# Altium PCB Driver_PCB.PcbDoc
Units mm, origin at the board's own origin, x right, y up, seen from the top; angles counter-clockwise.
Board outline 42 x 70 mm, 2 copper layers (Top Layer, Bottom Layer); 140 components, 0 nets, 464 pads, 56 vias.
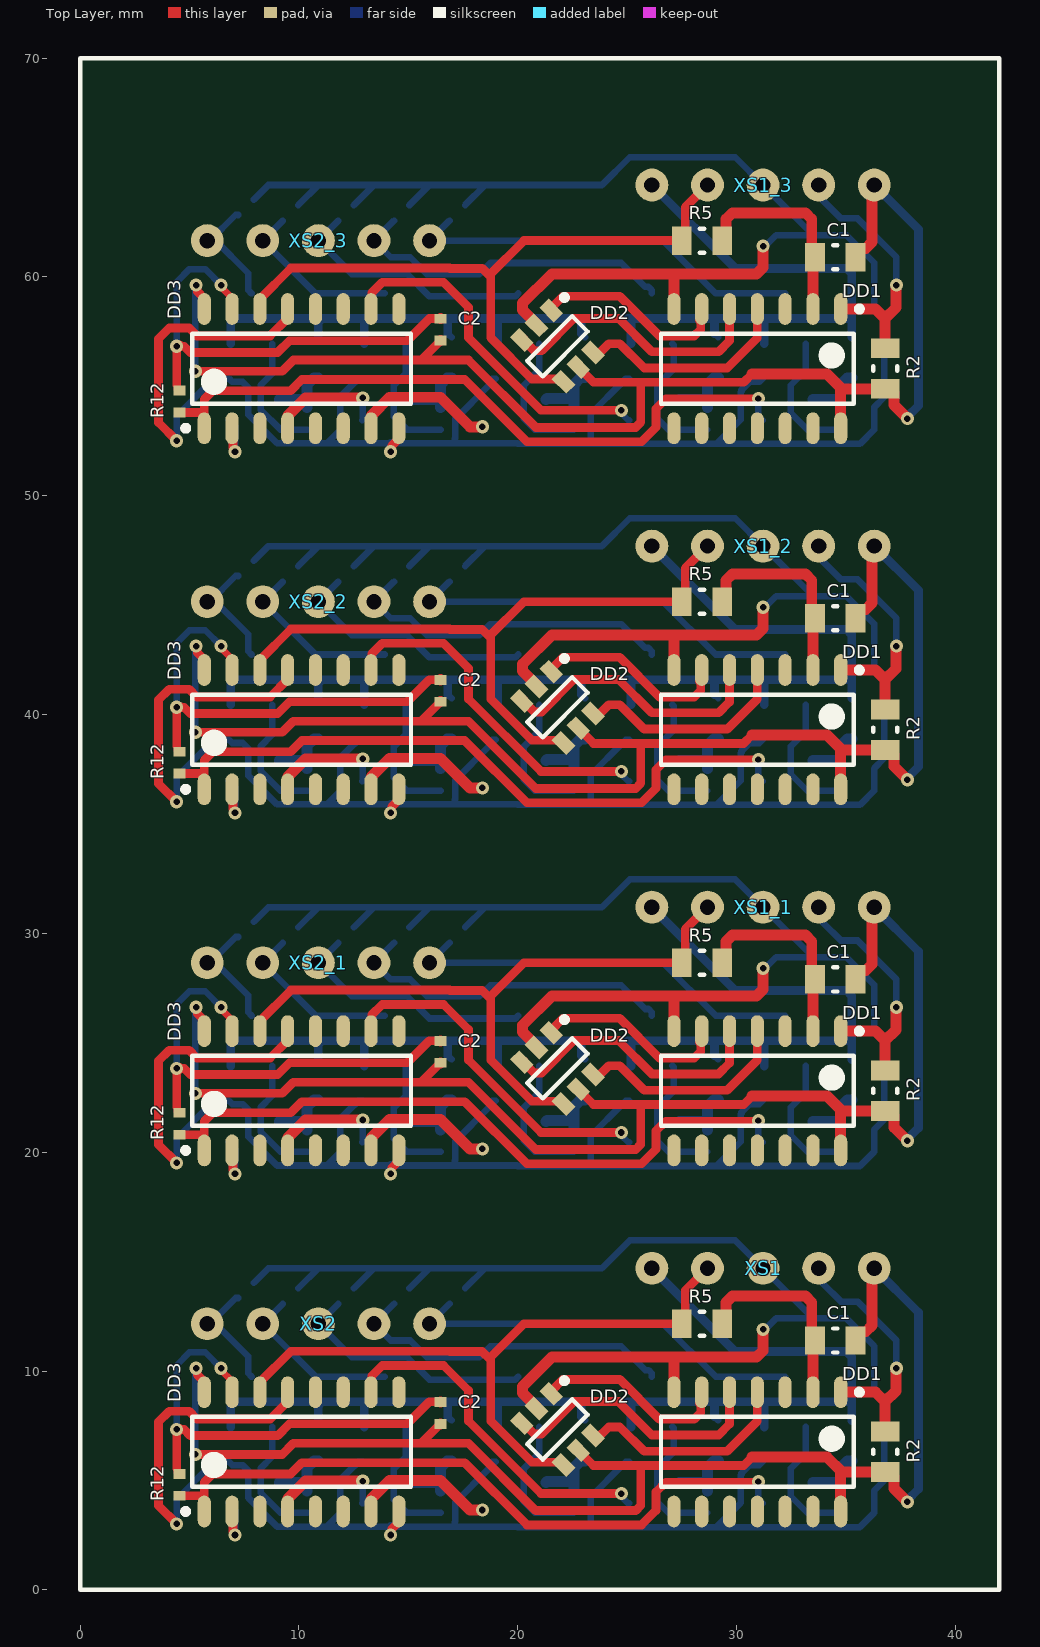
[diagram p0: Top Layer view]
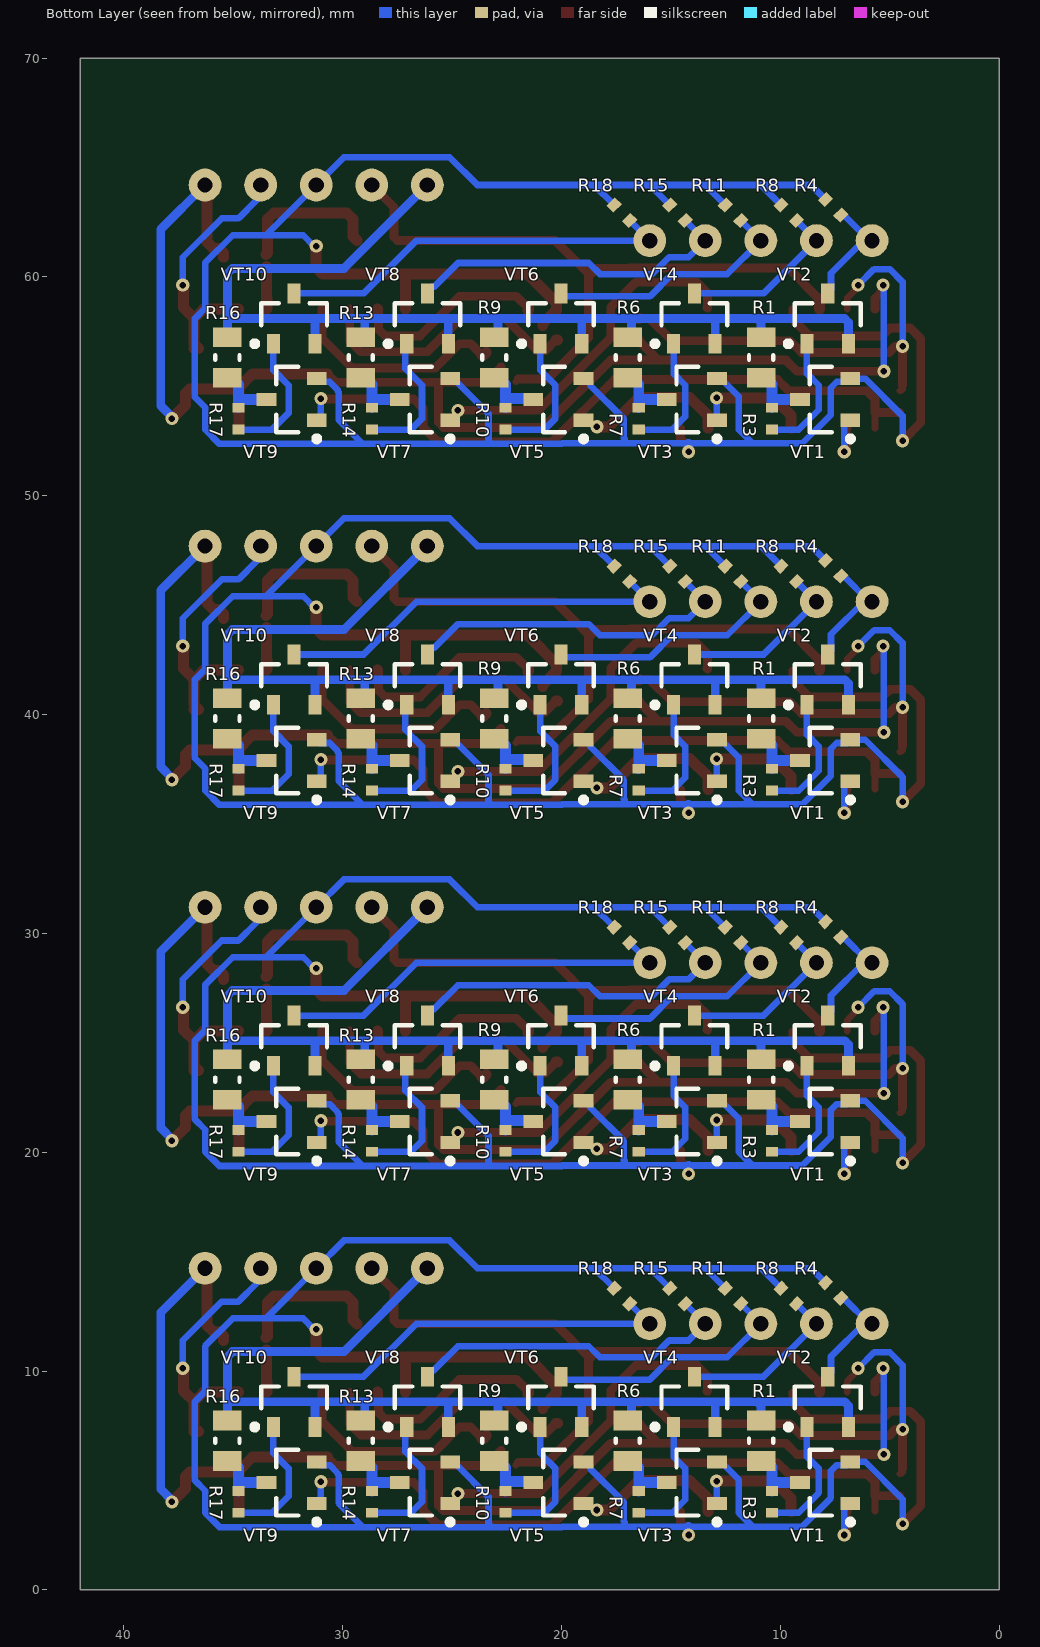
[diagram p1: Bottom Layer view, seen from below]

## Layer stack, top to bottom
Top Solder: solder mask 0.0102, Solder Resist, Dk 3.5
Top Layer: signal copper 0.0356
Dielectric 1: dielectric 0.32, FR-4, Dk 4.8
Bottom Layer: signal copper 0.0356
Bottom Solder: solder mask 0.0102, Solder Resist, Dk 3.5

## Board outline
0,0 0,70 42,70 42,0

## Design rules (kind name [scope] priority, off if disabled: settings)
Clearance [All] p1: gap=0.254 ignorepadtopadclearanceinfootprint=FALSE except(0: Arc-Hole Track-Hole SMDPad-Hole THPad-Hole Via-Hole Fill-Hole Poly-Hole Region-Hole Text-Hole)
PolygonConnect [All] p1: connectstyle=Relief reliefconductorwidth=0.254 reliefentries=4 polygonreliefangle="90 Angle" airgapwidth=0.254
RoutingVias [All] p1: holewidth=0.711 width=1.27 viastyle="Through Hole" minholewidth=0.711 minwidth=1.27 maxholewidth=0.711 maxwidth=1.27
SolderMaskExpansion [All] p1: expansion=0.102 istentingtop=FALSE
Width [All] p1: maxlimit=1 minlimit=0.254 preferedwidth=0.254 minimp=50.000000 maximp=50.000000 favimp=50.000000
30 further rules are at their usual default settings.

## Components (designator, comment, footprint, x,y, rotation, side; value= is the part's Value field where it differs from the comment)
C1 "C0805" CHIP-0805 34.512,60.898 r180 top
C1 "C0805" CHIP-0805 34.512,44.398 r180 top
C1 "C0805" CHIP-0805 34.512,27.898 r180 top
C1 "C0805" CHIP-0805 34.512,11.398 r180 top
C2 "C0805" CHIP-0402 16.47,57.588 r90 top
C2 "C0805" CHIP-0402 16.47,41.088 r90 top
C2 "C0805" CHIP-0402 16.47,24.588 r90 top
C2 "C0805" CHIP-0402 16.47,8.088 r90 top
DD1 "CD4024" SOIC-14 30.948,55.81 r270 top
DD1 "CD4024" SOIC-14 30.948,39.31 r270 top
DD1 "CD4024" SOIC-14 30.948,22.81 r270 top
DD1 "CD4024" SOIC-14 30.948,6.31 r270 top
DD2 "74LVC1G11" SOT23-6 21.812,56.834 r315 top
DD2 "74LVC1G11" SOT23-6 21.812,40.334 r315 top
DD2 "74LVC1G11" SOT23-6 21.812,23.834 r315 top
DD2 "74LVC1G11" SOT23-6 21.812,7.334 r315 top
DD3 "CD4017" SOIC-16 10.12,55.81 r90 top
DD3 "CD4017" SOIC-16 10.12,39.31 r90 top
DD3 "CD4017" SOIC-16 10.12,22.81 r90 top
DD3 "CD4017" SOIC-16 10.12,6.31 r90 top
R1 "R0805" CHIP-0805 10.882,56.318 r90 bottom
R1 "R0805" CHIP-0805 10.882,39.818 r90 bottom
R1 "R0805" CHIP-0805 10.882,23.318 r90 bottom
R1 "R0805" CHIP-0805 10.882,6.818 r90 bottom
R2 "R0805" CHIP-0805 36.79,55.81 r270 top
R2 "R0805" CHIP-0805 36.79,39.31 r270 top
R2 "R0805" CHIP-0805 36.79,22.81 r270 top
R2 "R0805" CHIP-0805 36.79,6.31 r270 top
R3 "R0805" CHIP-0402 10.374,53.524 r270 bottom
R3 "R0805" CHIP-0402 10.374,37.024 r270 bottom
R3 "R0805" CHIP-0402 10.374,20.524 r270 bottom
R3 "R0805" CHIP-0402 10.374,4.024 r270 bottom
R4 "R0805" CHIP-0402 7.588,63.184 r225 bottom
R4 "R0805" CHIP-0402 7.588,46.684 r225 bottom
R4 "R0805" CHIP-0402 7.588,30.184 r225 bottom
R4 "R0805" CHIP-0402 7.588,13.684 r225 bottom
R5 "R0805" CHIP-0805 28.416,61.66 r180 top
R5 "R0805" CHIP-0805 28.416,45.16 r180 top
R5 "R0805" CHIP-0805 28.416,28.66 r180 top
R5 "R0805" CHIP-0805 28.416,12.16 r180 top
R6 "R0805" CHIP-0805 16.978,56.318 r90 bottom
R6 "R0805" CHIP-0805 16.978,39.818 r90 bottom
R6 "R0805" CHIP-0805 16.978,23.318 r90 bottom
R6 "R0805" CHIP-0805 16.978,6.818 r90 bottom
R7 "R0805" CHIP-0402 16.47,53.524 r270 bottom
R7 "R0805" CHIP-0402 16.47,37.024 r270 bottom
R7 "R0805" CHIP-0402 16.47,20.524 r270 bottom
R7 "R0805" CHIP-0402 16.47,4.024 r270 bottom
R8 "R0805" CHIP-0402 9.62,62.93 r225 bottom
R8 "R0805" CHIP-0402 9.62,46.43 r225 bottom
R8 "R0805" CHIP-0402 9.62,29.93 r225 bottom
R8 "R0805" CHIP-0402 9.62,13.43 r225 bottom
R9 "R0805" CHIP-0805 23.074,56.318 r90 bottom
R9 "R0805" CHIP-0805 23.074,39.818 r90 bottom
R9 "R0805" CHIP-0805 23.074,23.318 r90 bottom
R9 "R0805" CHIP-0805 23.074,6.818 r90 bottom
R10 "R0805" CHIP-0402 22.566,53.524 r270 bottom
R10 "R0805" CHIP-0402 22.566,37.024 r270 bottom
R10 "R0805" CHIP-0402 22.566,20.524 r270 bottom
R10 "R0805" CHIP-0402 22.566,4.024 r270 bottom
R11 "R0805" CHIP-0402 12.16,62.93 r225 bottom
R11 "R0805" CHIP-0402 12.16,46.43 r225 bottom
R11 "R0805" CHIP-0402 12.16,29.93 r225 bottom
R11 "R0805" CHIP-0402 12.16,13.43 r225 bottom
R12 "R0805" CHIP-0402 4.54,54.302 r270 top
R12 "R0805" CHIP-0402 4.54,37.802 r270 top
R12 "R0805" CHIP-0402 4.54,21.302 r270 top
R12 "R0805" CHIP-0402 4.54,4.802 r270 top
R13 "R0805" CHIP-0805 29.17,56.318 r90 bottom
R13 "R0805" CHIP-0805 29.17,39.818 r90 bottom
R13 "R0805" CHIP-0805 29.17,23.318 r90 bottom
R13 "R0805" CHIP-0805 29.17,6.818 r90 bottom
R14 "R0805" CHIP-0402 28.662,53.524 r270 bottom
R14 "R0805" CHIP-0402 28.662,37.024 r270 bottom
R14 "R0805" CHIP-0402 28.662,20.524 r270 bottom
R14 "R0805" CHIP-0402 28.662,4.024 r270 bottom
R15 "R0805" CHIP-0402 14.7,62.93 r225 bottom
R15 "R0805" CHIP-0402 14.7,46.43 r225 bottom
R15 "R0805" CHIP-0402 14.7,29.93 r225 bottom
R15 "R0805" CHIP-0402 14.7,13.43 r225 bottom
R16 "R0805" CHIP-0805 35.266,56.318 r90 bottom
R16 "R0805" CHIP-0805 35.266,39.818 r90 bottom
R16 "R0805" CHIP-0805 35.266,23.318 r90 bottom
R16 "R0805" CHIP-0805 35.266,6.818 r90 bottom
R17 "R0805" CHIP-0402 34.758,53.524 r270 bottom
R17 "R0805" CHIP-0402 34.758,37.024 r270 bottom
R17 "R0805" CHIP-0402 34.758,20.524 r270 bottom
R17 "R0805" CHIP-0402 34.758,4.024 r270 bottom
R18 "R0805" CHIP-0402 17.24,62.93 r225 bottom
R18 "R0805" CHIP-0402 17.24,46.43 r225 bottom
R18 "R0805" CHIP-0402 17.24,29.93 r225 bottom
R18 "R0805" CHIP-0402 17.24,13.43 r225 bottom
VT1 "2N7000" SOT23-3 7.95,54.402 r0 bottom
VT1 "2N7000" SOT23-3 7.95,37.902 r0 bottom
VT1 "2N7000" SOT23-3 7.95,21.402 r0 bottom
VT1 "2N7000" SOT23-3 7.95,4.902 r0 bottom
VT2 "BC808" SOT23-3 7.834,58.096 r90 bottom
VT2 "BC808" SOT23-3 7.834,41.596 r90 bottom
VT2 "BC808" SOT23-3 7.834,25.096 r90 bottom
VT2 "BC808" SOT23-3 7.834,8.596 r90 bottom
VT3 "2N7000" SOT23-3 14.046,54.402 r0 bottom
VT3 "2N7000" SOT23-3 14.046,37.902 r0 bottom
VT3 "2N7000" SOT23-3 14.046,21.402 r0 bottom
VT3 "2N7000" SOT23-3 14.046,4.902 r0 bottom
VT4 "BC808" SOT23-3 13.93,58.096 r90 bottom
VT4 "BC808" SOT23-3 13.93,41.596 r90 bottom
VT4 "BC808" SOT23-3 13.93,25.096 r90 bottom
VT4 "BC808" SOT23-3 13.93,8.596 r90 bottom
VT5 "2N7000" SOT23-3 20.142,54.402 r0 bottom
VT5 "2N7000" SOT23-3 20.142,37.902 r0 bottom
VT5 "2N7000" SOT23-3 20.142,21.402 r0 bottom
VT5 "2N7000" SOT23-3 20.142,4.902 r0 bottom
VT6 "BC808" SOT23-3 20.026,58.096 r90 bottom
VT6 "BC808" SOT23-3 20.026,41.596 r90 bottom
VT6 "BC808" SOT23-3 20.026,25.096 r90 bottom
VT6 "BC808" SOT23-3 20.026,8.596 r90 bottom
VT7 "2N7000" SOT23-3 26.238,54.402 r0 bottom
VT7 "2N7000" SOT23-3 26.238,37.902 r0 bottom
VT7 "2N7000" SOT23-3 26.238,21.402 r0 bottom
VT7 "2N7000" SOT23-3 26.238,4.902 r0 bottom
VT8 "BC808" SOT23-3 26.122,58.096 r90 bottom
VT8 "BC808" SOT23-3 26.122,41.596 r90 bottom
VT8 "BC808" SOT23-3 26.122,25.096 r90 bottom
VT8 "BC808" SOT23-3 26.122,8.596 r90 bottom
VT9 "2N7000" SOT23-3 32.334,54.402 r0 bottom
VT9 "2N7000" SOT23-3 32.334,37.902 r0 bottom
VT9 "2N7000" SOT23-3 32.334,21.402 r0 bottom
VT9 "2N7000" SOT23-3 32.334,4.902 r0 bottom
VT10 "BC808" SOT23-3 32.218,58.096 r90 bottom
VT10 "BC808" SOT23-3 32.218,41.596 r90 bottom
VT10 "BC808" SOT23-3 32.218,25.096 r90 bottom
VT10 "BC808" SOT23-3 32.218,8.596 r90 bottom
XS1 "Socket" SOCKET 26.13,14.7 r0 top
XS1_1 "Socket" SOCKET 26.13,31.2 r0 top (schematic designator XS1)
XS1_2 "Socket" SOCKET 26.13,47.7 r0 top (schematic designator XS1)
XS1_3 "Socket" SOCKET 26.13,64.2 r0 top (schematic designator XS1)
XS2 "Socket" SOCKET 5.81,12.16 r0 top
XS2_1 "Socket" SOCKET 5.81,28.66 r0 top (schematic designator XS2)
XS2_2 "Socket" SOCKET 5.81,45.16 r0 top (schematic designator XS2)
XS2_3 "Socket" SOCKET 5.81,61.66 r0 top (schematic designator XS2)

## Footprints (in the part's own frame and the unit in brackets; to place one, negate y for a bottom-side part, rotate by r counter-clockwise, add the part's x,y. Pads: shape width x height; smd on the part's side, far side on the other; paste and mask are expansions set on the pad)
CHIP-0402 [mm] "Chip Resistor, 2-Leads, Body 1,00x0,50mm, IPC Medium Density"
  rect 0.45x0.55 smd: 1(-0.5,0) 2(0.5,0)
  body extent -0.5,-0.25 0.5,0.25, height 0.35
CHIP-0805 [mm] "Chip Resistor, 2-Leads, Body 2,00x1,25mm, IPC Medium Density"
  rect 0.9x1.3 smd: 1(-0.925,0) 2(0.925,0)
  silkscreen extent -0.1,-0.55 0.1,0.55, body extent -1,-0.63 1,0.63, height 0.7
SOCKET [mm]
  round 1.5 hole 0.7: 1(0,0) 2(2.54,0) 3(5.08,0) 4(7.62,0) 5(10.16,0)
SOIC-14 [mm] "SOIC, 14-Leads, Body 8,65x3,90mm, Pitch 1,27mm, IPC Medium Density"
  oval 1.45x0.6 smd: 1(-2.725,3.81) 2(-2.725,2.54) 3(-2.725,1.27) 4(-2.725,0) 5(-2.725,-1.27) 6(-2.725,-2.54) 7(-2.725,-3.81) 8(2.725,-3.81) 9(2.725,-2.54) 10(2.725,-1.27) 11(2.725,0) 12(2.725,1.27) 13(2.725,2.54) 14(2.725,3.81)
  silkscreen extent -2.85,-4.4 1.6,4.79, body extent -2,-4.4 2,4.4, height 1.75
SOIC-16 [mm] "SOIC, 16-Leads, Body 9,90x3,90mm, Pitch 1,27mm, IPC Medium Density"
  oval 1.45x0.6 smd: 1(-2.725,4.445) 2(-2.725,3.175) 3(-2.725,1.905) 4(-2.725,0.635) 5(-2.725,-0.635) 6(-2.725,-1.905) 7(-2.725,-3.175) 8(-2.725,-4.445) 9(2.725,-4.445) 10(2.725,-3.175) 11(2.725,-1.905) 12(2.725,-0.635) 13(2.725,0.635) 14(2.725,1.905) 15(2.725,3.175) 16(2.725,4.445)
  silkscreen extent -2.85,-5 1.6,5.42, body extent -2,-5 2,5, height 1.75
SOT23-3 [mm] "SOT23, 3-Leads, Body 2,90x2,30mm, Pitch 0,95mm, IPC Medium Density"
  rect 0.9x0.6 smd: 1(-1.15,0.95) 2(-1.15,-0.95) 3(1.15,0)
  silkscreen extent -1.27,-1.5 0.7,1.92, body extent -0.7,-1.5 0.7,1.5, height 1.1
SOT23-6 [mm] "SOT23, 6-Leads, Body 2,85x2,80mm, Pitch 0,95mm, IPC Medium Density"
  rect 0.95x0.6 smd: 1(-1.35,0.95) 2(-1.35,0) 3(-1.35,-0.95) 4(1.35,-0.95) 5(1.35,0) 6(1.35,0.95)
  silkscreen extent -1.47,-1.45 0.5,1.92, body extent -0.88,-1.45 0.88,1.45, height 1.1

## Via types
v1: diameter 0.6, hole 0.3, Top Layer to Bottom Layer, 56 vias

## Nets (pads, with @x,y where several pads share a name; then routed paths per layer and width w, separated by ;. In a path a pad name is that pad's centre, name@x,y a point inside that pad or via, vN(x,y) a via of type N, cw(c..) or ccw(c..) an arc to the next point about the centre after c; other vN are vias at no path point)
pads on no net: C1.1 C1.2 C2.1 C2.2 DD1.1 DD1.2 DD1.3 DD1.4 DD1.5 DD1.6 DD1.7 DD1.8 DD1.9 DD1.10 DD1.11 DD1.12 DD1.13 DD1.14 DD2.1 DD2.2 DD2.3 DD2.4 DD2.5 DD2.6 DD3.1 DD3.2 DD3.3 DD3.4 DD3.5 DD3.6 DD3.7 DD3.8 DD3.9 DD3.10 DD3.11 DD3.12 DD3.13 DD3.14 DD3.15 DD3.16 R1.1 R1.2 R2.1 R2.2 R3.1 R3.2 R4.1 R4.2 R5.1 R5.2 R6.1 R6.2 R7.1 R7.2 R8.1 R8.2 R9.1 R9.2 R10.1 R10.2 R11.1 R11.2 R12.1 R12.2 R13.1 R13.2 R14.1 R14.2 R15.1 R15.2 R16.1 R16.2 R17.1 R17.2 R18.1 R18.2 VT1.1 VT1.2 VT1.3 VT2.1 VT2.2 VT2.3 VT3.1 VT3.2 VT3.3 VT4.1 VT4.2 VT4.3 VT5.1 VT5.2 VT5.3 VT6.1 VT6.2 VT6.3 VT7.1 VT7.2 VT7.3 VT8.1 VT8.2 VT8.3 VT9.1 VT9.2 VT9.3 VT10.1 VT10.2 VT10.3 XS1.1 XS1.2 XS1.3 XS1.4 XS1.5 XS1_1.1 XS1_1.2 XS1_1.3 XS1_1.4 XS1_1.5 XS1_2.1 XS1_2.2 XS1_2.3 XS1_2.4 XS1_2.5 XS1_3.1 XS1_3.2 XS1_3.3 XS1_3.4 XS1_3.5 XS2.1 XS2.2 XS2.3 XS2.4 XS2.5 XS2_1.1 XS2_1.2 XS2_1.3 XS2_1.4 XS2_1.5 XS2_2.1 XS2_2.2 XS2_2.3 XS2_2.4 XS2_2.5 XS2_3.1 XS2_3.2 XS2_3.3 XS2_3.4 XS2_3.5
copper on no net: | length 2063.4
  Top Layer w0.3: 4.413,5.553 4.415,5.551 4.415,5.377 4.49,5.302 4.54,5.302 ; 4.413,22.053 4.415,22.051 4.415,21.877 4.49,21.802 4.54,21.802 ; 4.413,38.553 4.415,38.551 4.415,38.377 4.49,38.302 4.54,38.302 ; 4.413,55.053 4.415,55.051 4.415,54.877 4.49,54.802 4.54,54.802 ; 5.675,3.585 5.675,4.302 ; 5.675,20.085 5.675,20.802 ; 5.675,36.585 5.675,37.302 ; 5.675,53.085 5.675,53.802 ; v1(6.445,10.128) 6.445,10.041 6.945,9.541 6.945,9.035 ; v1(6.445,26.628) 6.445,26.541 6.945,26.041 6.945,25.535 ; v1(6.445,43.128) 6.445,43.041 6.945,42.541 6.945,42.035 ; v1(6.445,59.628) 6.445,59.541 6.945,59.041 6.945,58.535 ; 9.485,8.61 9.485,9.035 ; 9.485,25.11 9.485,25.535 ; 9.485,41.61 9.485,42.035 ; 9.485,58.11 9.485,58.535 ; 13.295,9.035 13.352,9.092 ; 13.295,25.535 13.352,25.592 ; 13.295,42.035 13.352,42.092 ; 13.295,58.535 13.352,58.592 ; 21.971,5.831 22.095,5.708 ; 21.971,22.331 22.095,22.208 ; 21.971,38.831 22.095,38.708 ; 21.971,55.331 22.095,55.208
  Top Layer w0.4: v1(4.413,3.016) 3.584,3.845 3.584,7.677 4.07,8.163 4.985,8.163 5.342,7.806 8.681,7.806 9.485,8.61 ; 4.413,5.553 v1(4.413,7.334) ; v1(4.413,19.516) 3.584,20.345 3.584,24.177 4.07,24.663 4.985,24.663 5.342,24.306 8.681,24.306 9.485,25.11 ; 4.413,22.053 v1(4.413,23.834) ; v1(4.413,36.016) 3.584,36.845 3.584,40.677 4.07,41.163 4.985,41.163 5.342,40.806 8.681,40.806 9.485,41.61 ; 4.413,38.553 v1(4.413,40.334) ; v1(4.413,52.516) 3.584,53.345 3.584,57.177 4.07,57.663 4.985,57.663 5.342,57.306 8.681,57.306 9.485,58.11 ; 4.413,55.053 v1(4.413,56.834) ; 4.54,4.302 5.675,4.302 5.675,4.913 6.064,5.302 9.62,5.302 10.128,5.81 17.581,5.81 20.421,2.97 25.659,2.97 26.321,3.632 26.321,4.477 26.765,4.921 v1@30.956,4.921 ; v1@4.54,7.334 4.748,7.334 5.03,7.052 9.034,7.052 9.57,7.588 14.954,7.588 15.962,8.596 16.462,8.596 ; 4.54,20.802 5.675,20.802 5.675,21.413 6.064,21.802 9.62,21.802 10.128,22.31 17.581,22.31 20.421,19.47 25.659,19.47 26.321,20.132 26.321,20.977 26.765,21.421 v1@30.956,21.421 ; v1@4.54,23.834 4.748,23.834 5.03,23.552 9.034,23.552 9.57,24.088 14.954,24.088 15.962,25.096 16.462,25.096 ; 4.54,37.302 5.675,37.302 5.675,37.913 6.064,38.302 9.62,38.302 10.128,38.81 17.581,38.81 20.421,35.97 25.659,35.97 26.321,36.632 26.321,37.477 26.765,37.921 v1@30.956,37.921 ; v1@4.54,40.334 4.748,40.334 5.03,40.052 9.034,40.052 9.57,40.588 14.954,40.588 15.962,41.596 16.462,41.596 ; 4.54,53.802 5.675,53.802 5.675,54.413 6.064,54.802 9.62,54.802 10.128,55.31 17.581,55.31 20.421,52.47 25.659,52.47 26.321,53.132 26.321,53.977 26.765,54.421 v1@30.956,54.421 ; v1@4.54,56.834 4.748,56.834 5.03,56.552 9.034,56.552 9.57,57.088 14.954,57.088 15.962,58.096 16.462,58.096 ; v1(5.269,6.191) 9.239,6.191 9.747,6.699 15.581,6.699 ; v1(5.269,22.691) 9.239,22.691 9.747,23.199 15.581,23.199 ; v1(5.269,39.191) 9.239,39.191 9.747,39.699 15.581,39.699 ; v1(5.269,55.691) 9.239,55.691 9.747,56.199 15.581,56.199 ; v1(5.302,10.128) 5.35,10.08 5.35,9.839 5.675,9.514 5.675,9.035 ; v1(5.302,26.628) 5.35,26.58 5.35,26.339 5.675,26.014 5.675,25.535 ; v1(5.302,43.128) 5.35,43.08 5.35,42.839 5.675,42.514 5.675,42.035 ; v1(5.302,59.628) 5.35,59.58 5.35,59.339 5.675,59.014 5.675,58.535 ; 6.945,3.585 6.983,3.547 6.983,2.672 7.08,2.576 v1(7.08,2.508) ; 6.945,20.085 6.983,20.047 6.983,19.172 7.08,19.076 v1(7.08,19.008) ; 6.945,36.585 6.983,36.547 6.983,35.672 7.08,35.576 v1(7.08,35.508) ; 6.945,53.085 6.983,53.047 6.983,52.172 7.08,52.076 v1(7.08,52.008) ; 8.215,9.485 9.639,10.909 16.876,10.909 16.895,10.89 18.383,10.89 18.764,10.509 18.764,7.715 20.648,5.831 21.971,5.831 ; 8.215,25.985 9.639,27.409 16.876,27.409 16.895,27.39 18.383,27.39 18.764,27.009 18.764,24.215 20.648,22.331 21.971,22.331 ; 8.215,42.485 9.639,43.909 16.876,43.909 16.895,43.89 18.383,43.89 18.764,43.509 18.764,40.715 20.648,38.831 21.971,38.831 ; 8.215,58.985 9.639,60.409 16.876,60.409 16.895,60.39 18.383,60.39 18.764,60.009 18.764,57.215 20.648,55.331 21.971,55.331 ; 13.352,9.092 13.333,9.112 13.333,9.777 13.811,10.255 16.605,10.255 17.748,9.112 17.748,7.715 21.06,4.403 v1(24.733,4.403) ; 13.352,25.592 13.333,25.612 13.333,26.277 13.811,26.755 16.605,26.755 17.748,25.612 17.748,24.215 21.06,20.903 v1(24.733,20.903) ; 13.352,42.092 13.333,42.112 13.333,42.777 13.811,43.255 16.605,43.255 17.748,42.112 17.748,40.715 21.06,37.403 v1(24.733,37.403) ; 13.352,58.592 13.333,58.612 13.333,59.277 13.811,59.755 16.605,59.755 17.748,58.612 17.748,57.215 21.06,53.903 v1(24.733,53.903) ; v1@14.24,2.781 14.565,3.106 14.565,3.585 ; v1@14.24,19.281 14.565,19.606 14.565,20.085 ; v1@14.24,35.781 14.565,36.106 14.565,36.585 ; v1@14.24,52.281 14.565,52.606 14.565,53.085 ; 16.47,7.588 15.581,6.699 ; 16.47,24.088 15.581,23.199 ; 16.47,40.588 15.581,39.699 ; 16.47,57.088 15.581,56.199 ; 18.701,10.573 20.288,12.16 27.491,12.16 27.654,12.323 27.654,13.684 28.67,14.7 ; 18.701,27.073 20.288,28.66 27.491,28.66 27.654,28.823 27.654,30.184 28.67,31.2 ; 18.701,43.572 20.288,45.16 27.491,45.16 27.654,45.323 27.654,46.684 28.67,47.7 ; 18.701,60.073 20.288,61.66 27.491,61.66 27.654,61.823 27.654,63.184 28.67,64.2 ; 20.256,7.617 20.75,7.123 21.093,7.123 22.574,8.604 24.606,8.604 26.13,7.08 29.178,7.08 29.678,7.58 29.678,9.035 ; 20.256,24.117 20.75,23.623 21.093,23.623 22.574,25.104 24.606,25.104 26.13,23.58 29.178,23.58 29.678,24.08 29.678,25.535 ; 20.256,40.617 20.75,40.123 21.093,40.123 22.574,41.604 24.606,41.604 26.13,40.08 29.178,40.08 29.678,40.58 29.678,42.035 ; 20.256,57.117 20.75,56.623 21.093,56.623 22.574,58.104 24.606,58.104 26.13,56.58 29.178,56.58 29.678,57.08 29.678,58.535 ; 21.503,9.057 22.066,9.62 24.656,9.62 26.47,7.806 28.065,7.806 28.358,8.099 28.358,8.533 ; 21.503,25.557 22.066,26.12 24.656,26.12 26.47,24.306 28.065,24.306 28.358,24.599 28.358,25.033 ; 21.503,42.057 22.066,42.62 24.656,42.62 26.47,40.806 28.065,40.806 28.358,41.099 28.358,41.533 ; 21.503,58.557 22.066,59.12 24.656,59.12 26.47,57.306 28.065,57.306 28.358,57.599 28.358,58.033 ; 22.767,6.379 23.463,5.683 25.622,5.683 ; 22.767,22.879 23.463,22.183 25.622,22.183 ; 22.767,39.379 23.463,38.683 25.622,38.683 ; 22.767,55.879 23.463,55.183 25.622,55.183 ; 23.633,6.927 24.153,7.448 24.666,7.448 25.777,6.337 29.578,6.337 30.948,7.707 30.948,9.035 ; 23.633,23.427 24.153,23.948 24.666,23.948 25.777,22.837 29.578,22.837 30.948,24.207 30.948,25.535 ; 23.633,39.927 24.153,40.448 24.666,40.448 25.777,39.337 29.578,39.337 30.948,40.707 30.948,42.035 ; 23.633,56.427 24.153,56.948 24.666,56.948 25.777,55.837 29.578,55.837 30.948,57.207 30.948,58.535 ; 30.702,6.064 30.321,5.683 29.233,5.683 25.622,5.683 ; 30.702,22.564 30.321,22.183 29.233,22.183 25.622,22.183 ; 30.702,39.064 30.321,38.683 29.233,38.683 25.622,38.683 ; 30.702,55.564 30.321,55.183 29.233,55.183 25.622,55.183 ; 15.581,6.699 17.748,6.699 20.823,3.624 25.388,3.624 25.622,3.859 25.622,5.683 ; 15.581,23.199 17.748,23.199 20.823,20.124 25.388,20.124 25.622,20.359 25.622,22.183 ; 15.581,39.699 17.748,39.699 20.823,36.624 25.388,36.624 25.622,36.859 25.622,38.683 ; 15.581,56.199 17.748,56.199 20.823,53.124 25.388,53.124 25.622,53.359 25.622,55.183
  Top Layer w0.5: v1(4.413,7.334) v1@4.54,7.334 ; v1(4.413,23.834) v1@4.54,23.834 ; v1(4.413,40.334) v1@4.54,40.334 ; v1(4.413,56.834) v1@4.54,56.834 ; 8.215,9.035 8.215,9.485 ; 8.215,25.535 8.215,25.985 ; 8.215,42.035 8.215,42.485 ; 8.215,58.535 8.215,58.985 ; 9.485,3.585 9.504,3.604 9.504,4.17 10.307,4.973 v1(12.914,4.973) ; 9.485,20.085 9.504,20.104 9.504,20.67 10.307,21.473 v1(12.914,21.473) ; 9.485,36.585 9.504,36.604 9.504,37.17 10.307,37.973 v1(12.914,37.973) ; 9.485,53.085 9.504,53.104 9.504,53.67 10.307,54.473 v1(12.914,54.473) ; 13.295,3.585 13.314,3.604 13.314,4.17 14.145,5.001 16.469,5.001 17.819,3.651 v1(18.383,3.651) ; 13.295,20.085 13.314,20.104 13.314,20.67 14.145,21.501 16.469,21.501 17.819,20.151 v1(18.383,20.151) ; 13.295,36.585 13.314,36.604 13.314,37.17 14.145,38.001 16.469,38.001 17.819,36.651 v1(18.383,36.651) ; 13.295,53.085 13.314,53.104 13.314,53.67 14.145,54.501 16.469,54.501 17.819,53.151 v1(18.383,53.151) ; 16.462,8.596 16.47,8.588 ; 16.462,25.096 16.47,25.088 ; 16.462,41.596 16.47,41.588 ; 16.462,58.096 16.47,58.088 ; 20.186,7.617 20.256,7.617 ; 20.186,24.117 20.256,24.117 ; 20.186,40.617 20.256,40.617 ; 20.186,57.117 20.256,57.117 ; 20.857,8.289 20.857,8.359 20.225,8.992 20.225,9.303 21.558,10.636 30.917,10.636 31.21,10.929 v1(31.21,11.906) ; 20.857,24.789 20.857,24.859 20.225,25.492 20.225,25.803 21.558,27.136 30.917,27.136 31.21,27.429 v1(31.21,28.406) ; 20.857,41.289 20.857,41.359 20.225,41.992 20.225,42.302 21.558,43.636 30.917,43.636 31.21,43.929 v1(31.21,44.906) ; 20.857,57.789 20.857,57.859 20.225,58.492 20.225,58.803 21.558,60.136 30.917,60.136 31.21,60.429 v1(31.21,61.406) ; 21.503,9.057 21.503,8.986 21.529,8.96 ; 21.503,25.557 21.503,25.486 21.529,25.46 ; 21.503,42.057 21.503,41.986 21.529,41.96 ; 21.503,58.557 21.503,58.486 21.529,58.46 ; 23.438,7.051 23.562,6.927 23.633,6.927 ; 23.438,23.551 23.562,23.427 23.633,23.427 ; 23.438,40.051 23.562,39.927 23.633,39.927 ; 23.438,56.551 23.562,56.427 23.633,56.427 ; 27.138,9.035 27.138,10.343 ; 27.138,25.535 27.138,26.843 ; 27.138,42.035 27.138,43.343 ; 27.138,58.535 27.138,59.843 ; 28.358,8.533 28.408,8.583 28.408,9.035 ; 28.358,25.033 28.408,25.083 28.408,25.535 ; 28.358,41.533 28.408,41.583 28.408,42.035 ; 28.358,58.033 28.408,58.083 28.408,58.535 ; 29.341,12.16 29.525,12.344 29.525,13.137 29.817,13.43 33.141,13.43 33.434,13.137 33.434,11.593 33.496,11.53 ; 29.341,28.66 29.525,28.844 29.525,29.637 29.817,29.93 33.141,29.93 33.434,29.637 33.434,28.093 33.496,28.03 ; 29.341,45.16 29.525,45.344 29.525,46.137 29.817,46.43 33.141,46.43 33.434,46.137 33.434,44.593 33.496,44.53 ; 29.341,61.66 29.525,61.844 29.525,62.637 29.817,62.93 33.141,62.93 33.434,62.637 33.434,61.093 33.496,61.03 ; 30.702,6.064 34.131,6.064 34.81,5.385 36.79,5.385 36.99,5.385 37.19,5.185 37.19,4.64 v1(37.806,4.024) ; 30.702,22.564 34.131,22.564 34.81,21.885 36.79,21.885 36.99,21.885 37.19,21.685 37.19,21.14 v1(37.806,20.524) ; 30.702,39.064 34.131,39.064 34.81,38.385 36.79,38.385 36.99,38.385 37.19,38.185 37.19,37.64 v1(37.806,37.024) ; 30.702,55.564 34.131,55.564 34.81,54.885 36.79,54.885 36.99,54.885 37.19,54.685 37.19,54.14 v1(37.806,53.524) ; 31.21,14.938 31.21,14.7 31.288,14.623 ; 31.21,31.438 31.21,31.2 31.288,31.123 ; 31.21,47.938 31.21,47.7 31.288,47.622 ; 31.21,64.438 31.21,64.2 31.288,64.123 ; 33.469,9.054 33.469,9.506 ; 33.469,25.554 33.469,26.006 ; 33.469,42.054 33.469,42.506 ; 33.469,58.554 33.469,59.006 ; 33.488,9.035 33.488,10.972 ; 33.488,25.535 33.488,27.472 ; 33.488,42.035 33.488,43.972 ; 33.488,58.535 33.488,60.472 ; 33.75,14.7 33.892,14.842 ; 33.75,31.2 33.892,31.342 ; 33.75,47.7 33.892,47.842 ; 33.75,64.2 33.892,64.342 ; 34.739,5.314 34.739,3.604 34.758,3.585 ; 34.739,21.814 34.739,20.104 34.758,20.085 ; 34.739,38.314 34.739,36.604 34.758,36.585 ; 34.739,54.814 34.739,53.104 34.758,53.085 ; 34.758,9.035 36.351,9.035 36.785,8.601 ; 34.758,25.535 36.351,25.535 36.785,25.101 ; 34.758,42.035 36.351,42.035 36.785,41.601 ; 34.758,58.535 36.351,58.535 36.785,58.101 ; 35.437,11.398 35.437,11.598 35.637,11.798 35.902,11.798 36.195,12.091 36.195,14.605 36.29,14.7 ; 35.437,27.898 35.437,28.098 35.637,28.298 35.902,28.298 36.195,28.591 36.195,31.105 36.29,31.2 ; 35.437,44.398 35.437,44.598 35.637,44.798 35.902,44.798 36.195,45.091 36.195,47.605 36.29,47.7 ; 35.437,60.898 35.437,61.098 35.637,61.298 35.902,61.298 36.195,61.591 36.195,64.105 36.29,64.2 ; 36.79,7.235 36.59,7.235 36.785,7.43 36.785,8.601 ; 36.79,23.735 36.59,23.735 36.785,23.93 36.785,25.101 ; 36.79,40.235 36.59,40.235 36.785,40.43 36.785,41.601 ; 36.79,56.735 36.59,56.735 36.785,56.93 36.785,58.101 ; v1(37.306,10.128) 37.277,10.099 37.277,9.094 36.785,8.601 ; v1(37.306,26.628) 37.277,26.599 37.277,25.594 36.785,25.101 ; v1(37.306,43.128) 37.277,43.099 37.277,42.094 36.785,41.601 ; v1(37.306,59.628) 37.277,59.599 37.277,58.594 36.785,58.101
  Bottom Layer w0.3: v1(4.413,3.016) 4.413,4.144 6.121,5.852 6.8,5.852 6.95,5.702 7.426,5.702 7.579,5.549 7.692,5.436 7.692,4.205 9.002,2.895 11.277,2.895 ; v1(4.413,7.334) 4.413,10.27 5,10.857 5.716,10.857 v1(6.445,10.128) ; v1(4.413,19.516) 4.413,20.644 6.121,22.352 6.8,22.352 6.95,22.202 7.426,22.202 7.579,22.049 7.692,21.936 7.692,20.705 9.002,19.395 11.277,19.395 ; v1(4.413,23.834) 4.413,26.77 5,27.357 5.716,27.357 v1(6.445,26.628) ; v1(4.413,36.016) 4.413,37.144 6.121,38.852 6.8,38.852 6.95,38.702 7.426,38.702 7.579,38.549 7.692,38.436 7.692,37.205 9.002,35.895 11.277,35.895 ; v1(4.413,40.334) 4.413,43.27 5,43.857 5.716,43.857 v1(6.445,43.128) ; v1(4.413,52.516) 4.413,53.644 6.121,55.352 6.8,55.352 6.95,55.202 7.426,55.202 7.579,55.049 7.692,54.936 7.692,53.705 9.002,52.395 11.277,52.395 ; v1(4.413,56.834) 4.413,59.77 5,60.357 5.716,60.357 v1(6.445,59.628) ; v1(5.269,6.191) 5.269,10.095 v1(5.302,10.128) ; v1(5.269,22.691) 5.269,26.595 v1(5.302,26.628) ; v1(5.269,39.191) 5.269,43.095 v1(5.302,43.128) ; v1(5.269,55.691) 5.269,59.595 v1(5.302,59.628) ; 6.8,3.952 7.08,3.672 v1(7.08,2.508) ; 6.8,20.452 7.08,20.172 v1(7.08,19.008) ; 6.8,36.952 7.08,36.672 v1(7.08,35.508) ; 6.8,53.452 7.08,53.172 v1(7.08,52.008) ; 7.234,13.33 7.224,13.341 7.118,13.341 5.937,12.16 5.81,12.16 6.191,12.16 7.684,10.667 7.684,9.896 7.834,9.746 ; 7.234,29.83 7.224,29.841 7.118,29.841 5.937,28.66 5.81,28.66 6.191,28.66 7.684,27.167 7.684,26.396 7.834,26.246 ; 7.234,46.33 7.224,46.341 7.118,46.341 5.937,45.16 5.81,45.16 6.191,45.16 7.684,43.667 7.684,42.896 7.834,42.746 ; 7.234,62.83 7.224,62.841 7.118,62.841 5.937,61.66 5.81,61.66 6.191,61.66 7.684,60.167 7.684,59.396 7.834,59.246 ; 7.942,14.038 8.604,14.7 10.89,14.7 ; 7.942,30.538 8.604,31.2 10.89,31.2 ; 7.942,47.038 8.604,47.7 10.89,47.7 ; 7.942,63.538 8.604,64.2 10.89,64.2 ; 8.784,7.446 8.784,6.086 8.246,5.548 8.246,4.435 9.157,3.524 10.374,3.524 ; 8.784,23.946 8.784,22.586 8.246,22.048 8.246,20.935 9.157,20.024 10.374,20.024 ; 8.784,40.446 8.784,39.086 8.246,38.548 8.246,37.435 9.157,36.524 10.374,36.524 ; 8.784,56.946 8.784,55.586 8.246,55.048 8.246,53.935 9.157,53.024 10.374,53.024 ; 9.266,13.076 8.35,12.16 10.764,9.746 13.93,9.746 ; 9.266,29.576 8.35,28.66 10.764,26.246 13.93,26.246 ; 9.266,46.076 8.35,45.16 10.764,42.746 13.93,42.746 ; 9.266,62.576 8.35,61.66 10.764,59.246 13.93,59.246 ; 9.974,13.784 10.89,14.7 ; 9.974,30.284 10.89,31.2 ; 9.974,46.784 10.89,47.7 ; 9.974,63.284 10.89,64.2 ; 11.806,13.076 10.89,12.16 12.422,10.628 14.946,10.628 15.962,9.612 19.892,9.612 20.026,9.746 ; 11.806,29.576 10.89,28.66 12.422,27.128 14.946,27.128 15.962,26.112 19.892,26.112 20.026,26.246 ; 11.806,46.076 10.89,45.16 12.422,43.628 14.946,43.628 15.962,42.612 19.892,42.612 20.026,42.746 ; 11.806,62.576 10.89,61.66 12.422,60.128 14.946,60.128 15.962,59.112 19.892,59.112 20.026,59.246 ; 12.514,13.784 13.43,14.7 ; 12.514,30.284 13.43,31.2 ; 12.514,46.784 13.43,47.7 ; 12.514,63.284 13.43,64.2 ; 12.896,3.952 12.914,3.97 v1(12.914,4.973) ; 12.896,5.852 12.746,5.852 12.596,5.702 12.56,5.702 11.898,5.04 11.898,3.516 11.277,2.895 ; 12.896,20.452 12.914,20.47 v1(12.914,21.473) ; 12.896,22.352 12.746,22.352 12.596,22.202 12.56,22.202 11.898,21.54 11.898,20.016 11.277,19.395 ; 12.896,36.952 12.914,36.97 v1(12.914,37.973) ; 12.896,38.852 12.746,38.852 12.596,38.702 12.56,38.702 11.898,38.04 11.898,36.516 11.277,35.895 ; 12.896,53.452 12.914,53.47 v1(12.914,54.473) ; 12.896,55.352 12.746,55.352 12.596,55.202 12.56,55.202 11.898,54.54 11.898,53.016 11.277,52.395 ; 12.914,8.596 12.98,8.53 ; 12.914,25.096 12.98,25.03 ; 12.914,41.596 12.98,41.53 ; 12.914,58.096 12.98,58.03 ; 14.346,13.076 13.43,12.16 14.192,11.398 15.083,11.398 15.853,10.628 18.248,10.628 18.756,11.136 24.732,11.136 25.822,10.046 25.972,10.046 26.122,9.896 26.122,9.746 ; 14.346,29.576 13.43,28.66 14.192,27.898 15.083,27.898 15.853,27.128 18.248,27.128 18.756,27.636 24.732,27.636 25.822,26.546 25.972,26.546 26.122,26.396 26.122,26.246 ; 14.346,46.076 13.43,45.16 14.192,44.398 15.083,44.398 15.853,43.628 18.248,43.628 18.756,44.136 24.732,44.136 25.822,43.046 25.972,43.046 26.122,42.896 26.122,42.746 ; 14.346,62.576 13.43,61.66 14.192,60.898 15.083,60.898 15.853,60.128 18.248,60.128 18.756,60.636 24.732,60.636 25.822,59.546 25.972,59.546 26.122,59.396 26.122,59.246 ; 14.88,7.446 14.88,6.086 14.342,5.548 14.342,4.435 14.342,4.12 14.938,3.524 16.47,3.524 ; 14.88,23.946 14.88,22.586 14.342,22.048 14.342,20.935 14.342,20.62 14.938,20.024 16.47,20.024 ; 14.88,40.446 14.88,39.086 14.342,38.548 14.342,37.435 14.342,37.12 14.938,36.524 16.47,36.524 ; 14.88,56.946 14.88,55.586 14.342,55.048 14.342,53.935 14.342,53.62 14.938,53.024 16.47,53.024 ; 15.054,13.784 15.97,14.7 ; 15.054,30.284 15.97,31.2 ; 15.054,46.784 15.97,47.7 ; 15.054,63.284 15.97,64.2 ; 16.802,7.919 16.978,7.743 ; 16.802,24.419 16.978,24.243 ; 16.802,40.919 16.978,40.743 ; 16.802,57.419 16.978,57.243 ; 16.886,13.076 15.97,12.16 26.63,12.16 29.044,9.746 32.218,9.746 ; 16.886,29.576 15.97,28.66 26.63,28.66 29.044,26.246 32.218,26.246 ; 16.886,46.076 15.97,45.16 26.63,45.16 29.044,42.746 32.218,42.746 ; 16.886,62.576 15.97,61.66 26.63,61.66 29.044,59.246 32.218,59.246 ; 17.594,13.784 18.51,14.7 ; 17.594,30.284 18.51,31.2 ; 17.594,46.784 18.51,47.7 ; 17.594,63.284 18.51,64.2 ; 18.992,5.852 18.842,5.852 18.692,5.702 18.692,5.552 17.149,4.009 17.149,3.132 17.119,3.102 17.119,2.895 ; 18.992,22.352 18.842,22.352 18.692,22.202 18.692,22.052 17.149,20.509 17.149,19.632 17.119,19.602 17.119,19.395 ; 18.992,38.852 18.842,38.852 18.692,38.702 18.692,38.552 17.149,37.009 17.149,36.132 17.119,36.102 17.119,35.895 ; 18.992,55.352 18.842,55.352 18.692,55.202 18.692,55.052 17.149,53.509 17.149,52.632 17.119,52.602 17.119,52.395 ; 19.01,8.596 19.076,8.53 ; 19.01,25.096 19.076,25.03 ; 19.01,41.596 19.076,41.53 ; 19.01,58.096 19.076,58.03 ; 20.976,7.446 20.976,6.244 20.28,5.548 20.28,4.024 20.78,3.524 22.566,3.524 ; 20.976,23.946 20.976,22.744 20.28,22.048 20.28,20.524 20.78,20.024 22.566,20.024 ; 20.976,40.446 20.976,39.244 20.28,38.548 20.28,37.024 20.78,36.524 22.566,36.524 ; 20.976,56.946 20.976,55.744 20.28,55.048 20.28,53.524 20.78,53.024 22.566,53.024 ; 22.898,7.919 23.074,7.743 ; 22.898,24.419 23.074,24.243 ; 22.898,40.919 23.074,40.743 ; 22.898,57.419 23.074,57.243 ; v1(24.733,4.403) 24.733,4.267 25.048,3.952 25.088,3.952 ; v1(24.733,20.903) 24.733,20.767 25.048,20.452 25.088,20.452 ; v1(24.733,37.403) 24.733,37.267 25.048,36.952 25.088,36.952 ; v1(24.733,53.903) 24.733,53.767 25.048,53.452 25.088,53.452 ; 25.088,5.852 24.938,5.852 24.788,5.702 23.336,4.25 23.336,3.016 23.19,2.87 ; 25.088,22.352 24.938,22.352 24.788,22.202 23.336,20.75 23.336,19.516 23.19,19.37 ; 25.088,38.852 24.938,38.852 24.788,38.702 23.336,37.25 23.336,36.016 23.19,35.87 ; 25.088,55.352 24.938,55.352 24.788,55.202 23.336,53.75 23.336,52.516 23.19,52.37 ; 25.106,8.596 25.172,8.53 ; 25.106,25.096 25.172,25.03 ; 25.106,41.596 25.172,41.53 ; 25.106,58.096 25.172,58.03 ; 27.072,7.446 27.138,7.38 27.138,6.31 26.376,5.548 26.376,4.024 26.876,3.524 28.662,3.524 ; 27.072,23.946 27.138,23.88 27.138,22.81 26.376,22.048 26.376,20.524 26.876,20.024 28.662,20.024 ; 27.072,40.446 27.138,40.38 27.138,39.31 26.376,38.548 26.376,37.024 26.876,36.524 28.662,36.524 ; 27.072,56.946 27.138,56.88 27.138,55.81 26.376,55.048 26.376,53.524 26.876,53.024 28.662,53.024 ; 28.994,7.919 29.17,7.743 ; 28.994,24.419 29.17,24.243 ; 28.994,40.919 29.17,40.743 ; 28.994,57.419 29.17,57.243 ; v1(30.994,4.94) 30.994,4.102 31.144,3.952 31.184,3.952 ; v1(30.994,21.44) 30.994,20.602 31.144,20.452 31.184,20.452 ; v1(30.994,37.94) 30.994,37.102 31.144,36.952 31.184,36.952 ; v1(30.994,54.44) 30.994,53.602 31.144,53.452 31.184,53.452 ; 31.184,5.852 31.034,5.702 30.594,5.702 30.224,5.332 30.224,5.276 30.186,5.238 30.186,3.977 29.079,2.87 ; 31.184,22.352 31.034,22.202 30.594,22.202 30.224,21.832 30.224,21.776 30.186,21.738 30.186,20.477 29.079,19.37 ; 31.184,38.852 31.034,38.702 30.594,38.702 30.224,38.332 30.224,38.276 30.186,38.238 30.186,36.977 29.079,35.87 ; 31.184,55.352 31.034,55.202 30.594,55.202 30.224,54.832 30.224,54.776 30.186,54.738 30.186,53.477 29.079,52.37 ; 31.202,8.596 31.268,8.53 ; 31.202,25.096 31.268,25.03 ; 31.202,41.596 31.268,41.53 ; 31.202,58.096 31.268,58.03 ; v1(31.21,11.906) 31.305,11.906 31.805,12.406 33.504,12.406 ; v1(31.21,28.406) 31.305,28.406 31.805,28.906 33.504,28.906 ; v1(31.21,44.906) 31.305,44.906 31.805,45.406 33.504,45.406 ; v1(31.21,61.406) 31.305,61.406 31.805,61.906 33.504,61.906 ; 33.168,7.446 33.168,6.244 32.472,5.548 32.472,4.278 33.226,3.524 34.758,3.524 ; 33.168,23.946 33.168,22.744 32.472,22.048 32.472,20.778 33.226,20.024 34.758,20.024 ; 33.168,40.446 33.168,39.244 32.472,38.548 32.472,37.278 33.226,36.524 34.758,36.524 ; 33.168,56.946 33.168,55.744 32.472,55.048 32.472,53.778 33.226,53.024 34.758,53.024 ; 33.75,14.7 33.93,14.52 33.93,14.012 34.766,13.176 35.528,13.176 37.306,11.398 v1(37.306,10.128) ; 33.75,31.2 33.93,31.02 33.93,30.512 34.766,29.676 35.528,29.676 37.306,27.898 v1(37.306,26.628) ; 33.75,47.7 33.93,47.52 33.93,47.012 34.766,46.176 35.528,46.176 37.306,44.398 v1(37.306,43.128) ; 33.75,64.2 33.93,64.02 33.93,63.512 34.766,62.676 35.528,62.676 37.306,60.898 v1(37.306,59.628) ; v1(37.806,4.024) v1@37.806,4.104 ; v1(37.806,20.524) v1@37.806,20.604 ; v1(37.806,37.024) v1@37.806,37.104 ; v1(37.806,53.524) v1@37.806,53.604 ; 10.89,14.7 13.43,14.7 ; 10.89,31.2 13.43,31.2 ; 10.89,47.7 13.43,47.7 ; 10.89,64.2 13.43,64.2 ; 11.277,2.895 14.198,2.895 17.119,2.895 ; 11.277,19.395 14.198,19.395 17.119,19.395 ; 11.277,35.895 14.198,35.895 17.119,35.895 ; 11.277,52.395 14.198,52.395 17.119,52.395 ; 13.43,14.7 15.97,14.7 ; 13.43,31.2 15.97,31.2 ; 13.43,47.7 15.97,47.7 ; 13.43,64.2 15.97,64.2 ; 15.97,14.7 18.51,14.7 ; 15.97,31.2 18.51,31.2 ; 15.97,47.7 18.51,47.7 ; 15.97,64.2 18.51,64.2 ; 17.119,2.895 19.965,2.895 19.99,2.87 23.19,2.87 ; 17.119,19.395 19.965,19.395 19.99,19.37 23.19,19.37 ; 17.119,35.895 19.965,35.895 19.99,35.87 23.19,35.87 ; 17.119,52.395 19.965,52.395 19.99,52.37 23.19,52.37 ; 18.51,14.7 23.844,14.7 25.114,15.97 29.94,15.97 31.21,14.7 33.504,12.406 ; 18.51,31.2 23.844,31.2 25.114,32.47 29.94,32.47 31.21,31.2 33.504,28.906 ; 18.51,47.7 23.844,47.7 25.114,48.97 29.94,48.97 31.21,47.7 33.504,45.406 ; 18.51,64.2 23.844,64.2 25.114,65.47 29.94,65.47 31.21,64.2 33.504,61.906 ; 23.19,2.87 29.079,2.87 ; 23.19,19.37 29.079,19.37 ; 23.19,35.87 29.079,35.87 ; 23.19,52.37 29.079,52.37 ; 29.079,2.87 35.636,2.87 36.282,3.516 36.282,4.532 36.752,5.002 36.752,8.604 36.29,9.066 36.29,11.144 35.028,12.406 33.504,12.406 ; 29.079,19.37 35.636,19.37 36.282,20.016 36.282,21.032 36.752,21.502 36.752,25.104 36.29,25.566 36.29,27.644 35.028,28.906 33.504,28.906 ; 29.079,35.87 35.636,35.87 36.282,36.516 36.282,37.532 36.752,38.002 36.752,41.604 36.29,42.066 36.29,44.144 35.028,45.406 33.504,45.406 ; 29.079,52.37 35.636,52.37 36.282,53.016 36.282,54.032 36.752,54.502 36.752,58.104 36.29,58.566 36.29,60.644 35.028,61.906 33.504,61.906
  Bottom Layer w0.4: 6.884,7.446 6.884,8.42 7.06,8.596 10.882,8.596 11.058,8.596 ; 6.884,23.946 6.884,24.92 7.06,25.096 10.882,25.096 11.058,25.096 ; 6.884,40.446 6.884,41.42 7.06,41.596 10.882,41.596 11.058,41.596 ; 6.884,56.946 6.884,57.92 7.06,58.096 10.882,58.096 11.058,58.096 ; 10.882,7.743 10.882,8.42 11.058,8.596 ; 10.882,24.243 10.882,24.92 11.058,25.096 ; 10.882,40.743 10.882,41.42 11.058,41.596 ; 10.882,57.243 10.882,57.92 11.058,58.096 ; 12.98,7.446 12.98,8.53 ; 12.98,23.946 12.98,25.03 ; 12.98,40.446 12.98,41.53 ; 12.98,56.946 12.98,58.03 ; v1(14.192,2.508) 14.198,2.514 14.198,2.895 ; v1(14.192,19.008) 14.198,19.014 14.198,19.395 ; v1(14.192,35.508) 14.198,35.514 14.198,35.895 ; v1(14.192,52.008) 14.198,52.014 14.198,52.395 ; 16.802,7.919 16.802,8.596 ; 16.802,24.419 16.802,25.096 ; 16.802,40.919 16.802,41.596 ; 16.802,57.419 16.802,58.096 ; 19.076,7.446 19.076,8.53 ; 19.076,23.946 19.076,25.03 ; 19.076,40.446 19.076,41.53 ; 19.076,56.946 19.076,58.03 ; 22.898,7.919 22.898,8.596 ; 22.898,24.419 22.898,25.096 ; 22.898,40.919 22.898,41.596 ; 22.898,57.419 22.898,58.096 ; 25.172,7.446 25.172,8.53 ; 25.172,23.946 25.172,25.03 ; 25.172,40.446 25.172,41.53 ; 25.172,56.946 25.172,58.03 ; 26.13,14.7 29.94,10.89 35.032,10.89 35.266,10.656 35.266,8.596 ; 26.13,31.2 29.94,27.39 35.032,27.39 35.266,27.156 35.266,25.096 ; 26.13,47.7 29.94,43.89 35.032,43.89 35.266,43.656 35.266,41.596 ; 26.13,64.2 29.94,60.39 35.032,60.39 35.266,60.156 35.266,58.096 ; 28.994,7.919 28.994,8.596 ; 28.994,24.419 28.994,25.096 ; 28.994,40.919 28.994,41.596 ; 28.994,57.419 28.994,58.096 ; 31.268,7.446 31.268,8.53 ; 31.268,23.946 31.268,25.03 ; 31.268,40.446 31.268,41.53 ; 31.268,56.946 31.268,58.03 ; 35.266,7.743 35.266,8.596 ; 35.266,24.243 35.266,25.096 ; 35.266,40.743 35.266,41.596 ; 35.266,57.243 35.266,58.096 ; 36.29,14.7 38.314,12.676 38.314,4.612 v1@37.806,4.104 ; 36.29,31.2 38.314,29.176 38.314,21.112 v1@37.806,20.604 ; 36.29,47.7 38.314,45.676 38.314,37.612 v1@37.806,37.104 ; 36.29,64.2 38.314,62.176 38.314,54.112 v1@37.806,53.604 ; 11.058,8.596 12.914,8.596 16.802,8.596 ; 11.058,25.096 12.914,25.096 16.802,25.096 ; 11.058,41.596 12.914,41.596 16.802,41.596 ; 11.058,58.096 12.914,58.096 16.802,58.096 ; 16.802,8.596 19.01,8.596 22.898,8.596 ; 16.802,25.096 19.01,25.096 22.898,25.096 ; 16.802,41.596 19.01,41.596 22.898,41.596 ; 16.802,58.096 19.01,58.096 22.898,58.096 ; 22.898,8.596 25.106,8.596 28.994,8.596 ; 22.898,25.096 25.106,25.096 28.994,25.096 ; 22.898,41.596 25.106,41.596 28.994,41.596 ; 22.898,58.096 25.106,58.096 28.994,58.096 ; 28.994,8.596 31.202,8.596 35.266,8.596 ; 28.994,25.096 31.202,25.096 35.266,25.096 ; 28.994,41.596 31.202,41.596 35.266,41.596 ; 28.994,58.096 31.202,58.096 35.266,58.096
  Bottom Layer w0.5: 9.1,4.902 10.222,4.902 10.374,5.055 ; 9.1,21.402 10.222,21.402 10.374,21.555 ; 9.1,37.902 10.222,37.902 10.374,38.054 ; 9.1,54.402 10.222,54.402 10.374,54.555 ; 10.374,4.524 10.374,5.055 ; 10.374,21.024 10.374,21.555 ; 10.374,37.524 10.374,38.054 ; 10.374,54.024 10.374,54.555 ; 10.882,5.893 10.682,5.893 10.374,5.585 10.374,5.055 ; 10.882,22.393 10.682,22.393 10.374,22.085 10.374,21.555 ; 10.882,38.893 10.682,38.893 10.374,38.585 10.374,38.054 ; 10.882,55.393 10.682,55.393 10.374,55.085 10.374,54.555 ; 15.196,4.902 16.318,4.902 16.47,5.055 ; 15.196,21.402 16.318,21.402 16.47,21.555 ; 15.196,37.902 16.318,37.902 16.47,38.054 ; 15.196,54.402 16.318,54.402 16.47,54.555 ; 16.47,4.524 16.47,5.055 ; 16.47,21.024 16.47,21.555 ; 16.47,37.524 16.47,38.054 ; 16.47,54.024 16.47,54.555 ; 16.978,5.893 16.778,5.893 16.47,5.585 16.47,5.055 ; 16.978,22.393 16.778,22.393 16.47,22.085 16.47,21.555 ; 16.978,38.893 16.778,38.893 16.47,38.585 16.47,38.054 ; 16.978,55.393 16.778,55.393 16.47,55.085 16.47,54.555 ; 21.292,4.902 21.342,4.952 22.464,4.952 22.566,5.055 ; 21.292,21.402 21.342,21.452 22.464,21.452 22.566,21.555 ; 21.292,37.902 21.342,37.952 22.464,37.952 22.566,38.054 ; 21.292,54.402 21.342,54.452 22.464,54.452 22.566,54.555 ; 22.566,4.524 22.566,5.055 ; 22.566,21.024 22.566,21.555 ; 22.566,37.524 22.566,38.054 ; 22.566,54.024 22.566,54.555 ; 23.074,5.893 22.874,5.893 22.566,5.585 22.566,5.055 ; 23.074,22.393 22.874,22.393 22.566,22.085 22.566,21.555 ; 23.074,38.893 22.874,38.893 22.566,38.585 22.566,38.054 ; 23.074,55.393 22.874,55.393 22.566,55.085 22.566,54.555 ; 27.388,4.902 28.51,4.902 28.662,5.055 ; 27.388,21.402 28.51,21.402 28.662,21.555 ; 27.388,37.902 28.51,37.902 28.662,38.054 ; 27.388,54.402 28.51,54.402 28.662,54.555 ; 28.662,4.524 28.662,5.055 ; 28.662,21.024 28.662,21.555 ; 28.662,37.524 28.662,38.054 ; 28.662,54.024 28.662,54.555 ; 29.17,5.893 28.97,5.893 28.662,5.585 28.662,5.055 ; 29.17,22.393 28.97,22.393 28.662,22.085 28.662,21.555 ; 29.17,38.893 28.97,38.893 28.662,38.585 28.662,38.054 ; 29.17,55.393 28.97,55.393 28.662,55.085 28.662,54.555 ; 33.484,4.902 34.606,4.902 34.758,5.055 ; 33.484,21.402 34.606,21.402 34.758,21.555 ; 33.484,37.902 34.606,37.902 34.758,38.054 ; 33.484,54.402 34.606,54.402 34.758,54.555 ; 34.758,4.524 34.758,5.055 ; 34.758,21.024 34.758,21.555 ; 34.758,37.524 34.758,38.054 ; 34.758,54.024 34.758,54.555 ; 35.266,5.893 35.066,5.893 34.758,5.585 34.758,5.055 ; 35.266,22.393 35.066,22.393 34.758,22.085 34.758,21.555 ; 35.266,38.893 35.066,38.893 34.758,38.585 34.758,38.054 ; 35.266,55.393 35.066,55.393 34.758,55.085 34.758,54.555

## Silkscreen, mask and mechanical layers (free items; w line width, h text height)
Top Overlay:
  the board outline again, w0.2
Board:
  lines w0.2: 2,2 40,2 40,16.5 24,16.5 23,15.5 2,15.5 2,2 ; 2,18.5 2,32 23,32 24,33 40,33 40,18.5 2,18.5 ; 2,35 2,48.5 23,48.5 24,49.5 40,49.5 40,35 2,35 ; 2,51.5 2,65 23,65 24,66 40,66 40,51.5 2,51.5